# Altium PCB PCB.PcbDoc
Units mil, origin at the board's own origin, x right, y up, seen from the top; angles counter-clockwise.
Board outline 6000 x 4000 mil, 2 copper layers (Top Layer, Bottom Layer); 23 components, 14 nets, 50 pads, 0 vias.
Unrouted connection lines stored in the file: 36.
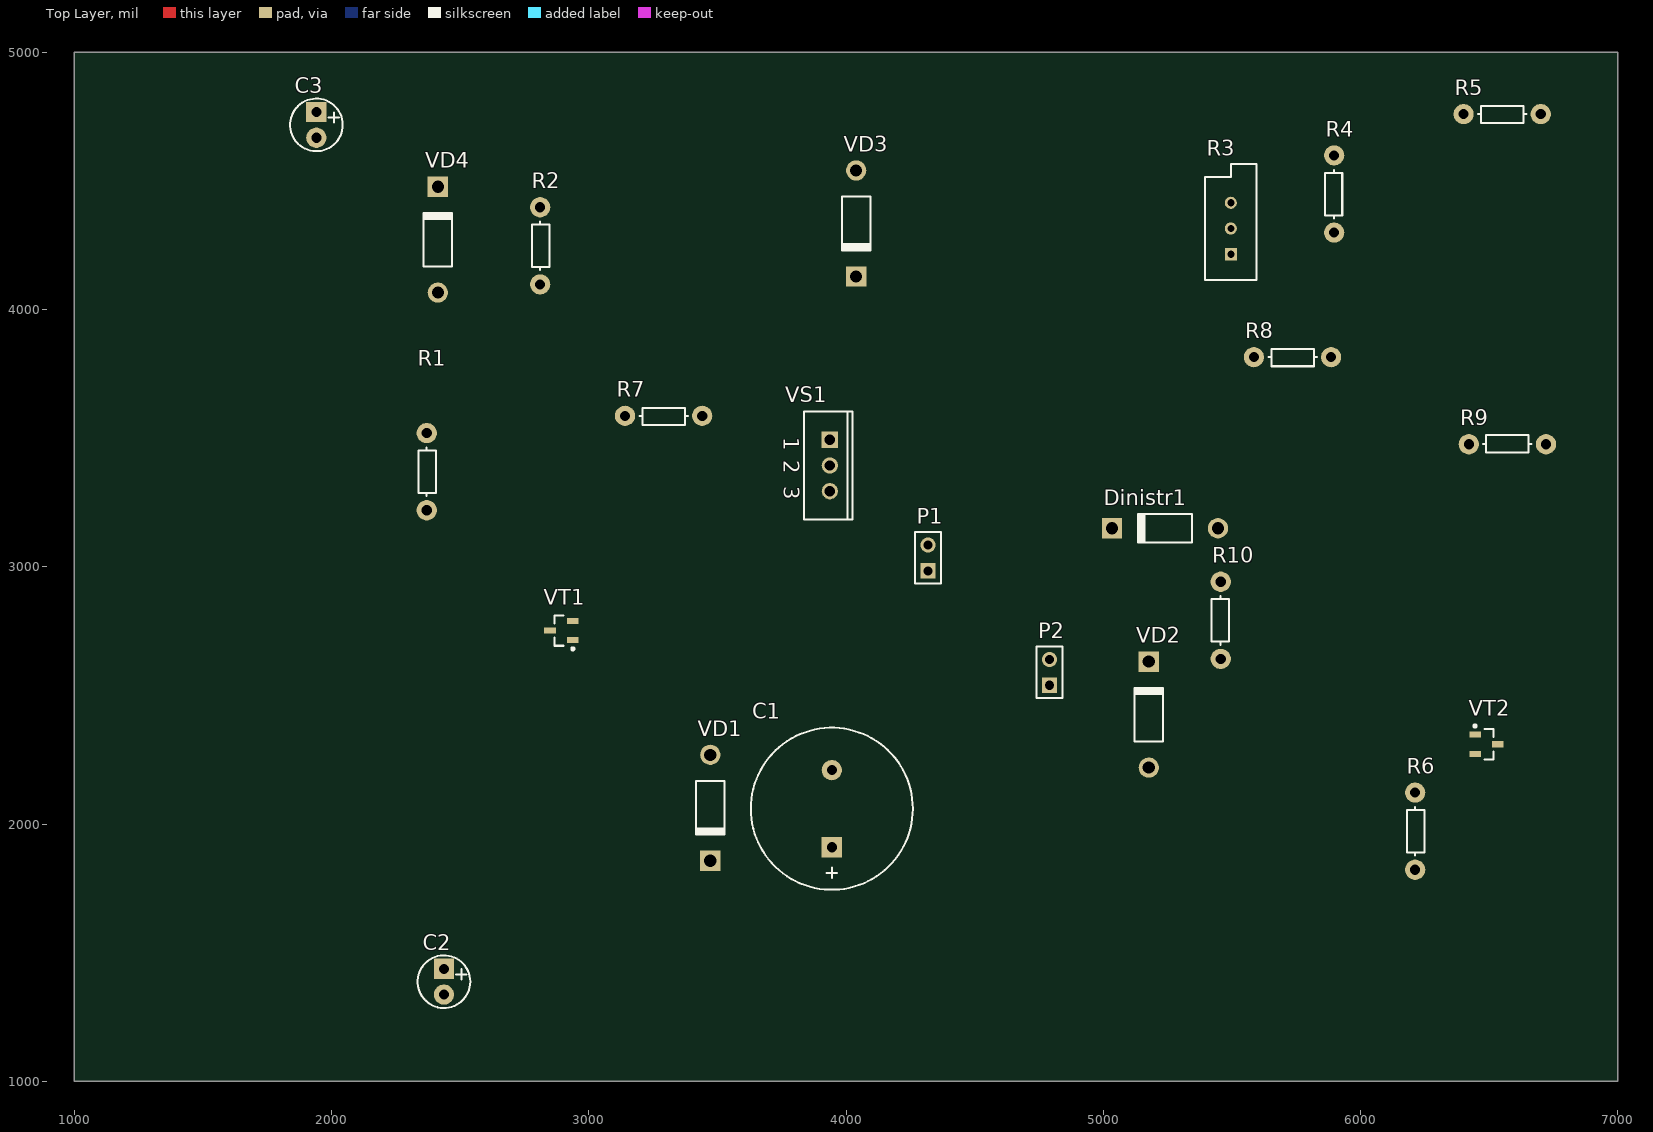
[diagram p0: Top Layer view]
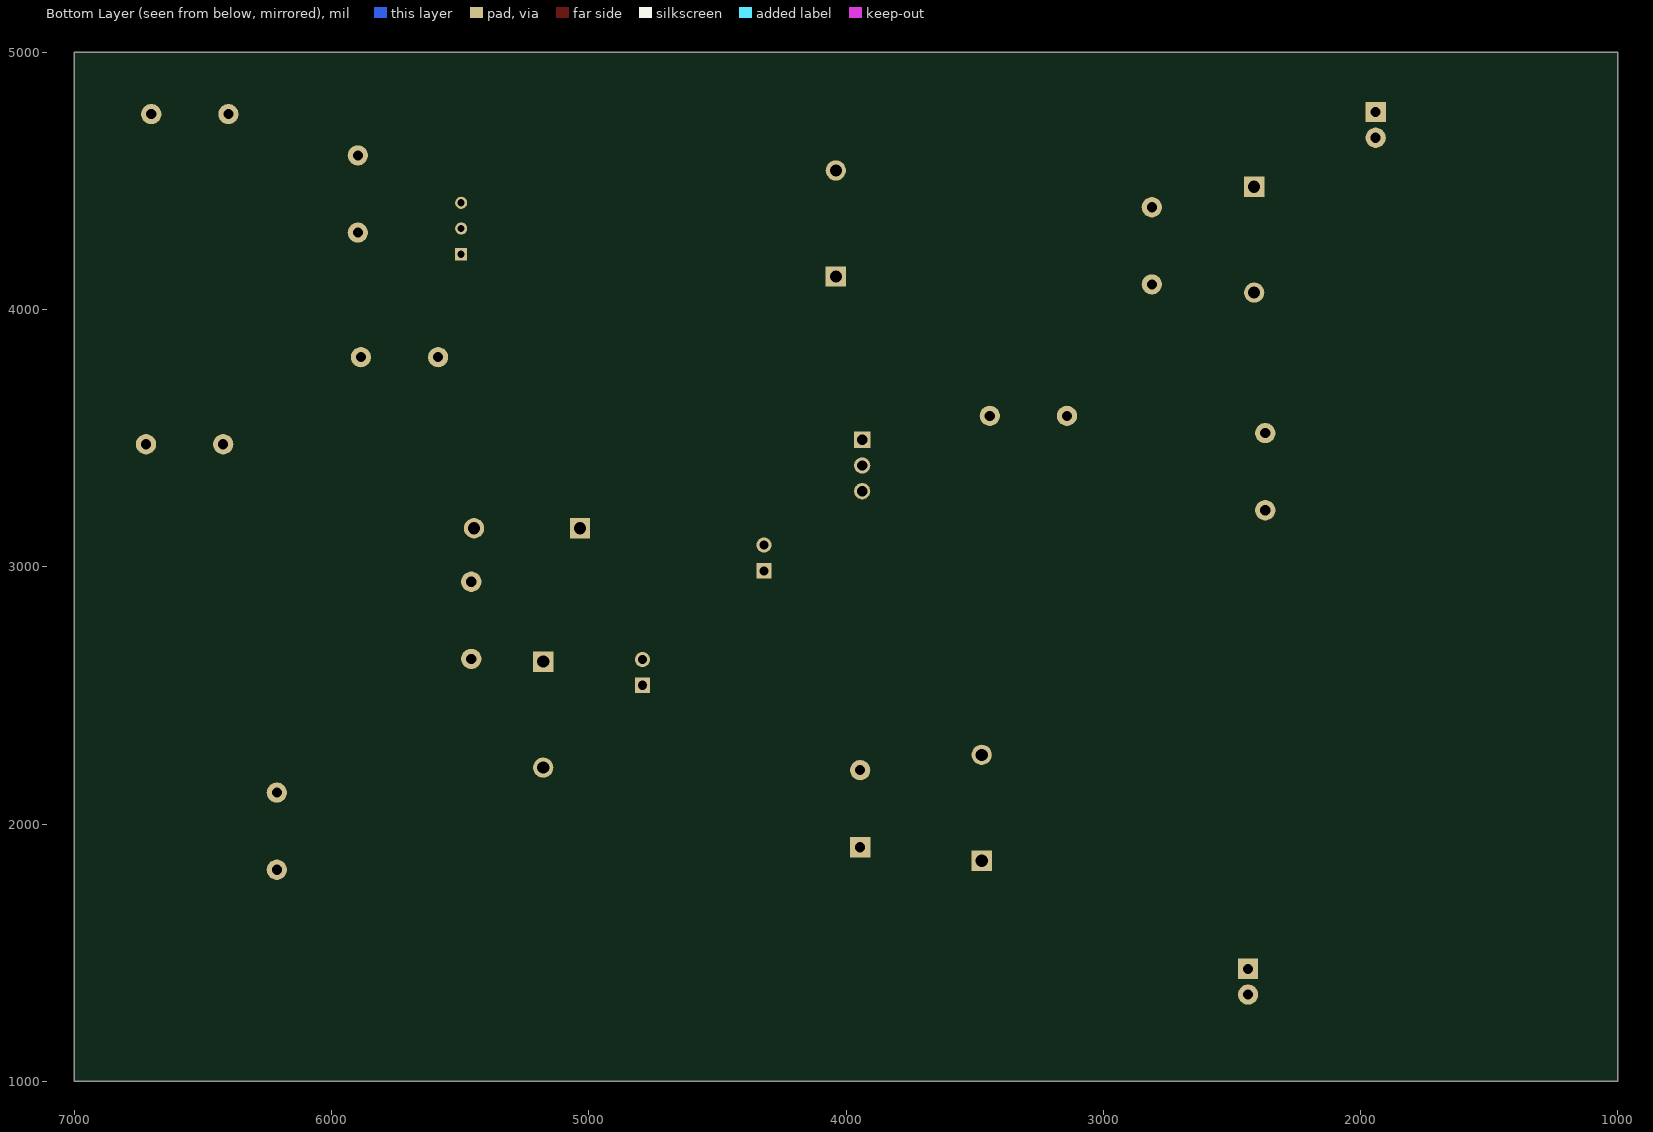
[diagram p1: Bottom Layer view, seen from below]

## Layer stack, top to bottom
Top Solder: solder mask 0.4, Solder Resist, Dk 3.5
Top Layer: signal copper 1.4
Dielectric 1: dielectric 12.6, FR-4, Dk 4.8
Bottom Layer: signal copper 1.4
Bottom Solder: solder mask 0.4, Solder Resist, Dk 3.5

## Board outline
1000,1000 7000,1000 7000,5000 1000,5000

## Design rules (kind name [scope] priority, off if disabled: settings)
Clearance [All] p1: gap=10
PolygonConnect [All] p1: connectstyle=Relief reliefconductorwidth=10 reliefentries=4 polygonreliefangle="90 Angle" airgapwidth=10
RoomDefinition Shema [InComponentClass('Shema')] p1: confinementstyle=ConfineIn formatcopy=TRUE lockcomponents=FALSE outline 0,0 2000,0 2000,1000 0,1000
RoutingVias [All] p1: holewidth=28 width=50 viastyle="Through Hole" minholewidth=28 minwidth=50 maxholewidth=28 maxwidth=50
SolderMaskExpansion [All] p1: expansion=4
Width [All] p1: maxlimit=10 minlimit=10 preferedwidth=10
29 further rules are at their usual default settings.

## Components (designator, comment, footprint, x,y, rotation, side; value= is the part's Value field where it differs from the comment)
C1 "2000mF 10V" "Cap p7.62mm D16mm (4p)" 3944.88,1909.45 r90 top
C2 "50mF 10V" "Cap p2.54mm D5mm (2p)" 2437.01,1437.01 r270 top
C3 "50mF 10V" "Cap p2.54mm D5mm (2p)" 1940.94,4767.72 r270 top
Dinistr1 "КН102" DO-41 5240.16,3149.61 r180 top
P1 "220V" HDR1X2 4318.9,2984.25 r90 top
P2 "Output" HDR1X2 4791.34,2539.37 r90 top
R1 "1.5k" "Res p7.62" 2370.08,3519.68 r270 top
R2 "5.1k" "Res p7.62" 2811.02,4397.64 r270 top
R3 "RPot" VR5 5496.06,4314.96 r90 top
R4 "20k" "Res p7.62" 5897.64,4299.21 r90 top
R5 "5.1k" "Res p7.62" 6700.79,4759.84 r180 top
R6 "1.5k" "Res p7.62" 6212.6,2122.05 r270 top
R7 "4.3k" "Res p7.62" 3440.94,3586.61 r180 top
R8 "1.5k" "Res p7.62" 5885.83,3814.96 r180 top
R9 "18k 2W" "Res p7.62" 6421.26,3476.38 r0 top
R10 "68k 0.5W" "Res p7.62" 5456.69,2641.73 r90 top
VD1 "Стабилитрон Д809" DO-204AL 3472.44,2062.99 r270 top
VD2 "КД209А" DO-41 5177.17,2425.2 r90 top
VD3 "КД209А" DO-41 4039.37,4334.65 r270 top
VD4 "КД209А" DO-41 2413.39,4271.65 r90 top
VS1 "КУ202К" TO-220-AB 3937.01,3393.7 r270 top
VT1 "PNP МП39Б" SOT-23B_N 2893.7,2751.97 r180 top
VT2 "PNP МП39Б" SOT-23B_N 6490,2310 r0 top

## Footprints (in the part's own frame and the unit in brackets; to place one, negate y for a bottom-side part, rotate by r counter-clockwise, add the part's x,y. Pads: shape width x height; smd on the part's side, far side on the other; paste and mask are expansions set on the pad)
"Cap p2.54mm D5mm (2p)" [mm] "D 5mm; H 8mm"
  rect 2x2 hole 1: 1(0,0)
  round 2 hole 1: 2(2.54,0)
  silkscreen extent -1.33,-2.6 3.87,2.6
"Cap p7.62mm D16mm (4p)" [mm] "D 16mm; H 16mm"
  rect 2x2 hole 1: 1(0,0)
  round 2 hole 1: 2(7.62,0)
  silkscreen extent -4.19,-8 11.81,8
DO-41 [mm] "Diode, Axial; Body 5.2 x 2.7 mm (LxDia. max), Lead Dia. 0.86 mm (max)"
  round 2 hole 1.2: 1(-5.23,0)
  rect 2x2 hole 1.2: 2(5.23,0)
  silkscreen extent -2.65,-1.4 2.75,1.4
DO-204AL [mm] "Diode, Axial; Body 5.2 x 2.7 mm (LxDia. max), Lead Dia. 0.86 mm (max)"
  round 2 hole 1.2: 1(-5.23,0)
  rect 2x2 hole 1.2: 2(5.23,0)
  silkscreen extent -2.65,-1.4 2.75,1.4
HDR1X2 [mm] "Connector; Header; 2 Position"
  rect 1.5x1.5 hole 0.9: 1(0,0)
  round 1.5 hole 0.9: 2(2.54,0)
  silkscreen extent -1.27,-1.27 3.81,1.27
"Res p7.62" [mm] "L p7.62; horisontal"
  round 2 hole 1: 1(0,0) 2(7.62,0)
  silkscreen extent 1.4,-0.8 6.2,0.9
SOT-23B_N [mm] "SOT23, 3-Leads, Body 2.9x1.3mm, Pitch 0.95mm, Lead Span 2.4mm, IPC Medium Density"
  rect 1.15x0.6 smd: 1(-1.125,0.95) 2(-1.125,-0.95) 3(1.125,0)
  silkscreen extent -1.25,-1.5 0.7,1.92, body extent -0.7,-1.5 0.7,1.5, height 1.14
TO-220-AB [mm] "TO, Thru-Hole, Vertical, Heatsink Mounted; 3 In-Line Leads; Pitch 2.54 mm"
  rect 1.6x1.6 hole 1: 1(-2.54,0)
  round 1.6 hole 1: 2(0,0) 3(2.54,0)
  silkscreen extent -5.35,-2.55 5.35,2.25
VR5 [mm] "Thru-Hole; 3 Leads"
  rect 1.2x1.2 hole 0.7: 1(-2.54,0)
  round 1.2 hole 0.7: 2(0,0) 3(2.54,0)
  silkscreen extent -5.08,-2.54 6.35,2.54

## Part data
C1 C2 C3: library part "Cap Cylinder", "Capacitor Electrolitic"
Dinistr1 VD2 VD3 VD4: library part "Diode 1N4002", "1 Amp General Purpose Rectifier"
P1 P2: library part "Header 2", "Header, 2-Pin"
R1 R2 R4 R5 R6 R7 R8 R9 R10: library part Resistor
R3: "Potentiometer"
VD1: library part "Diode 11DQ03", "Schottky Rectifier"
VS1: library part SCR, "Silicon Controlled Rectifier"
VT1 VT2: library part PNP, "PNP Bipolar Transistor"

## Nets (pads, with @x,y where several pads share a name; then routed paths per layer and width w, separated by ;. In a path a pad name is that pad's centre, name@x,y a point inside that pad or via, vN(x,y) a via of type N, cw(c..) or ccw(c..) an arc to the next point about the centre after c; other vN are vias at no path point)
NetC1_1: C1.1 R7.2 R9.2 VD1.2 VT1.3 VT2.3
NetC1_2: C1.2 P1.2 R1.1 R4.1 R8.1 VD1.1 VD4.1 VS1.3
NetC2_1: C2.1 R2.2 VT1.2
NetC2_2: C2.2 R6.2 VT2.1
NetC3_1: C3.1 R5.2 VT2.2
NetC3_2: C3.2 R1.2 VT1.1
NetDinistr1_1: Dinistr1.1 R10.2
NetDinistr1_2: Dinistr1.2 P2.2 VD3.2 VS1.1
NetP1_1: P1.1 P2.1 VD2.1
NetR2_1: R2.1 R3.1
NetR3_2: R3.2 R5.1
NetR3_3: R3.3 R4.2 VD3.1 VD4.2
NetR6_1: R6.1 R7.1 R8.2 VS1.2
NetR9_1: R9.1 R10.1 VD2.2

## Text inside footprints (layer, text, board x,y; h text height)
VS1: Top Overlay "1" at 3758.86,3503.54 h59.06 r270; Top Overlay "2" at 3758.86,3413.39 h59.06 r270; Top Overlay "3" at 3758.86,3313.39 h59.06 r270